# Altium PCB SRLatch.PcbDoc
Units mm, origin at the board's own origin, x right, y up, seen from the top; angles counter-clockwise.
Board outline 50 x 50 mm, 2 copper layers (Top Layer, Bottom Layer); 7 components, 6 nets, 28 pads, 2 vias.
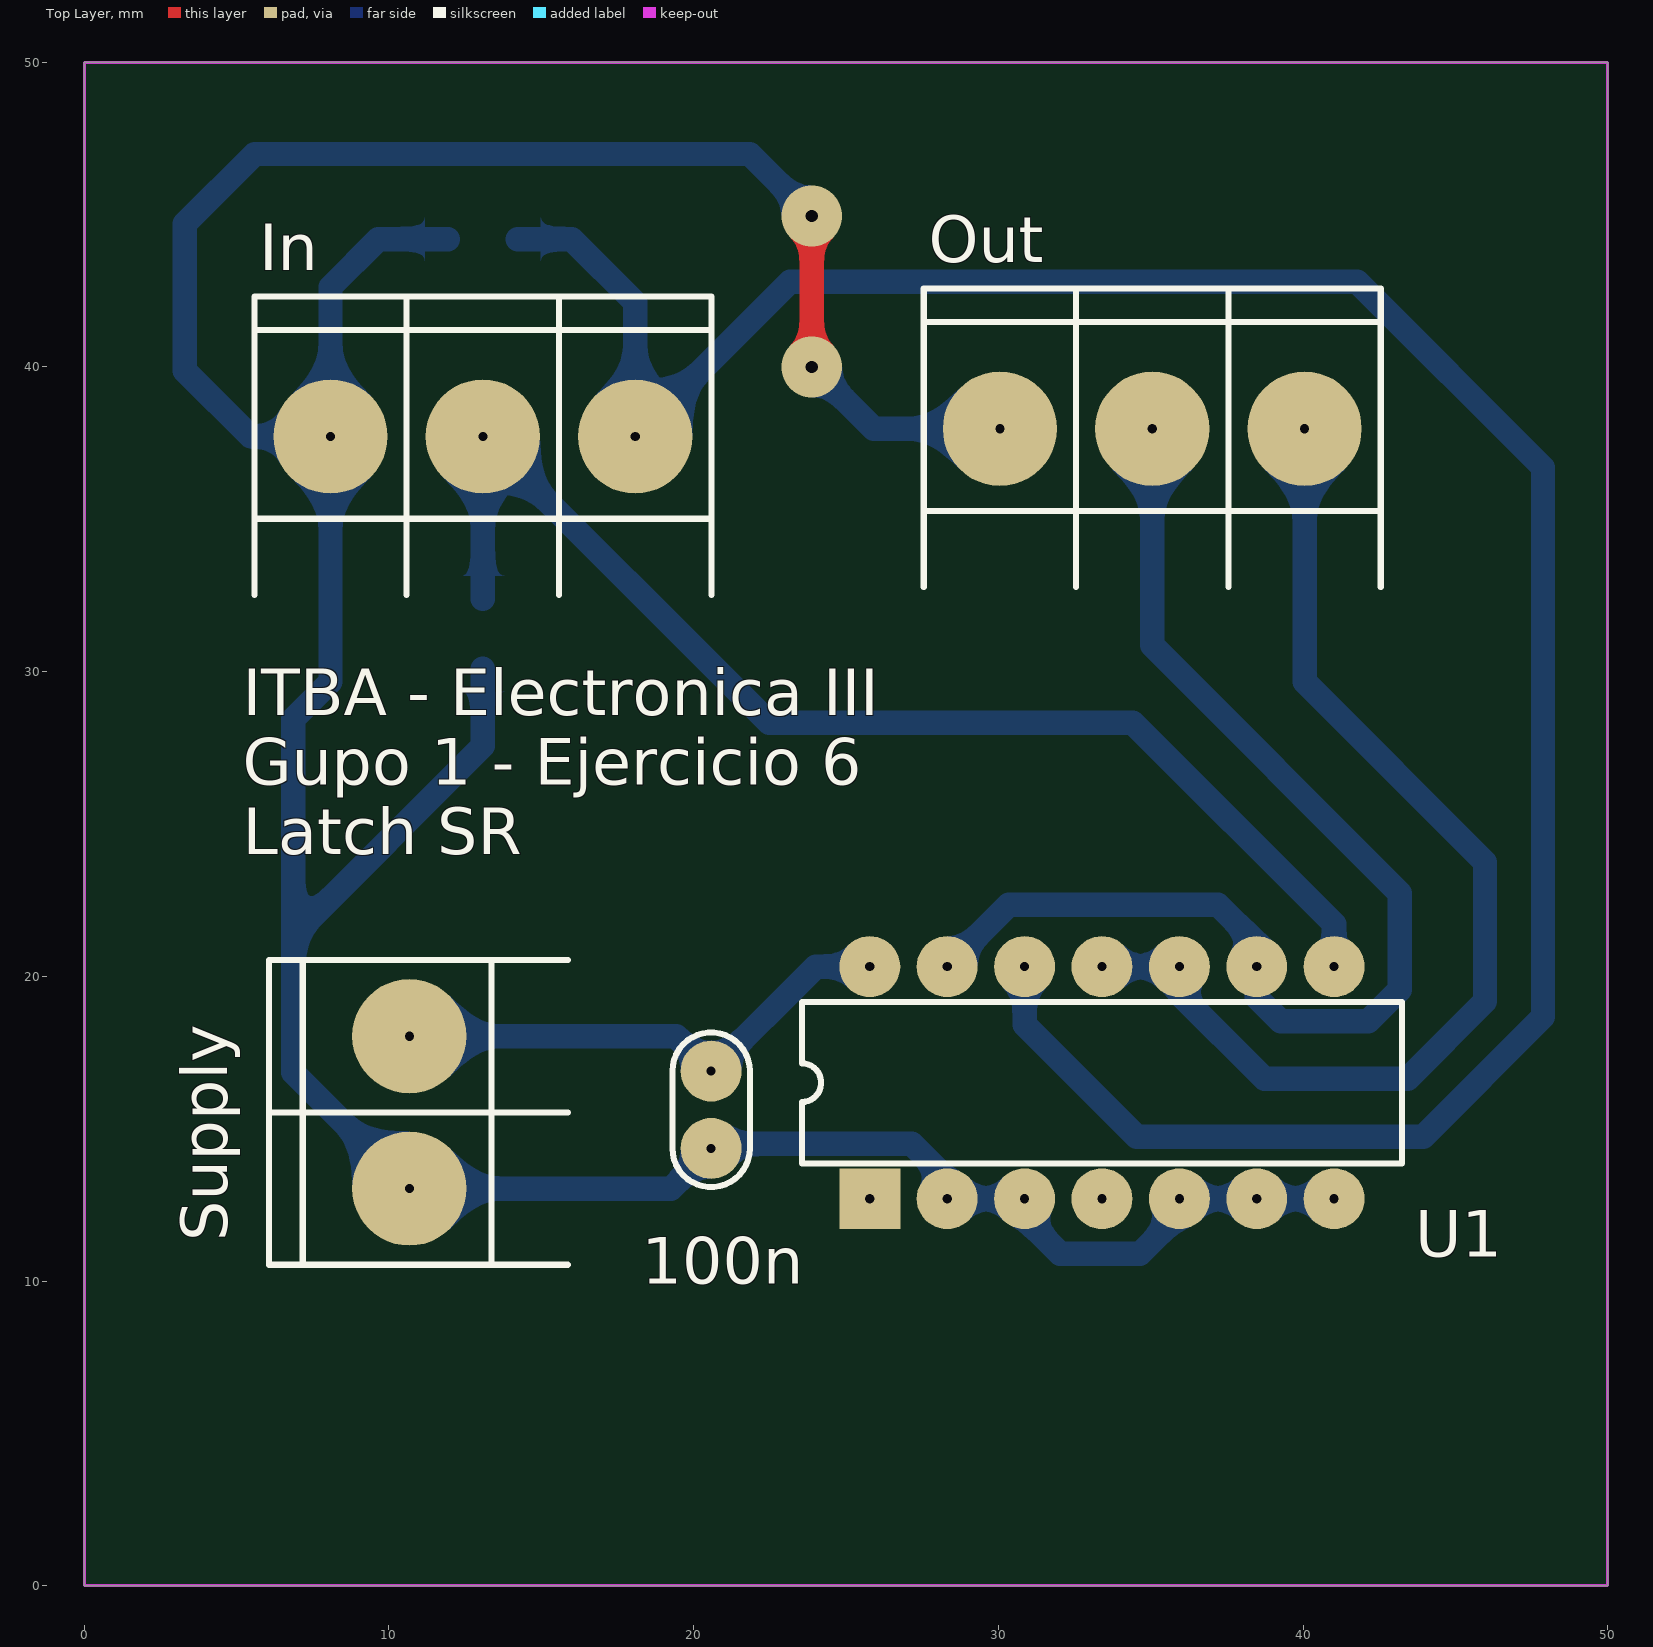
[diagram p0: Top Layer view]
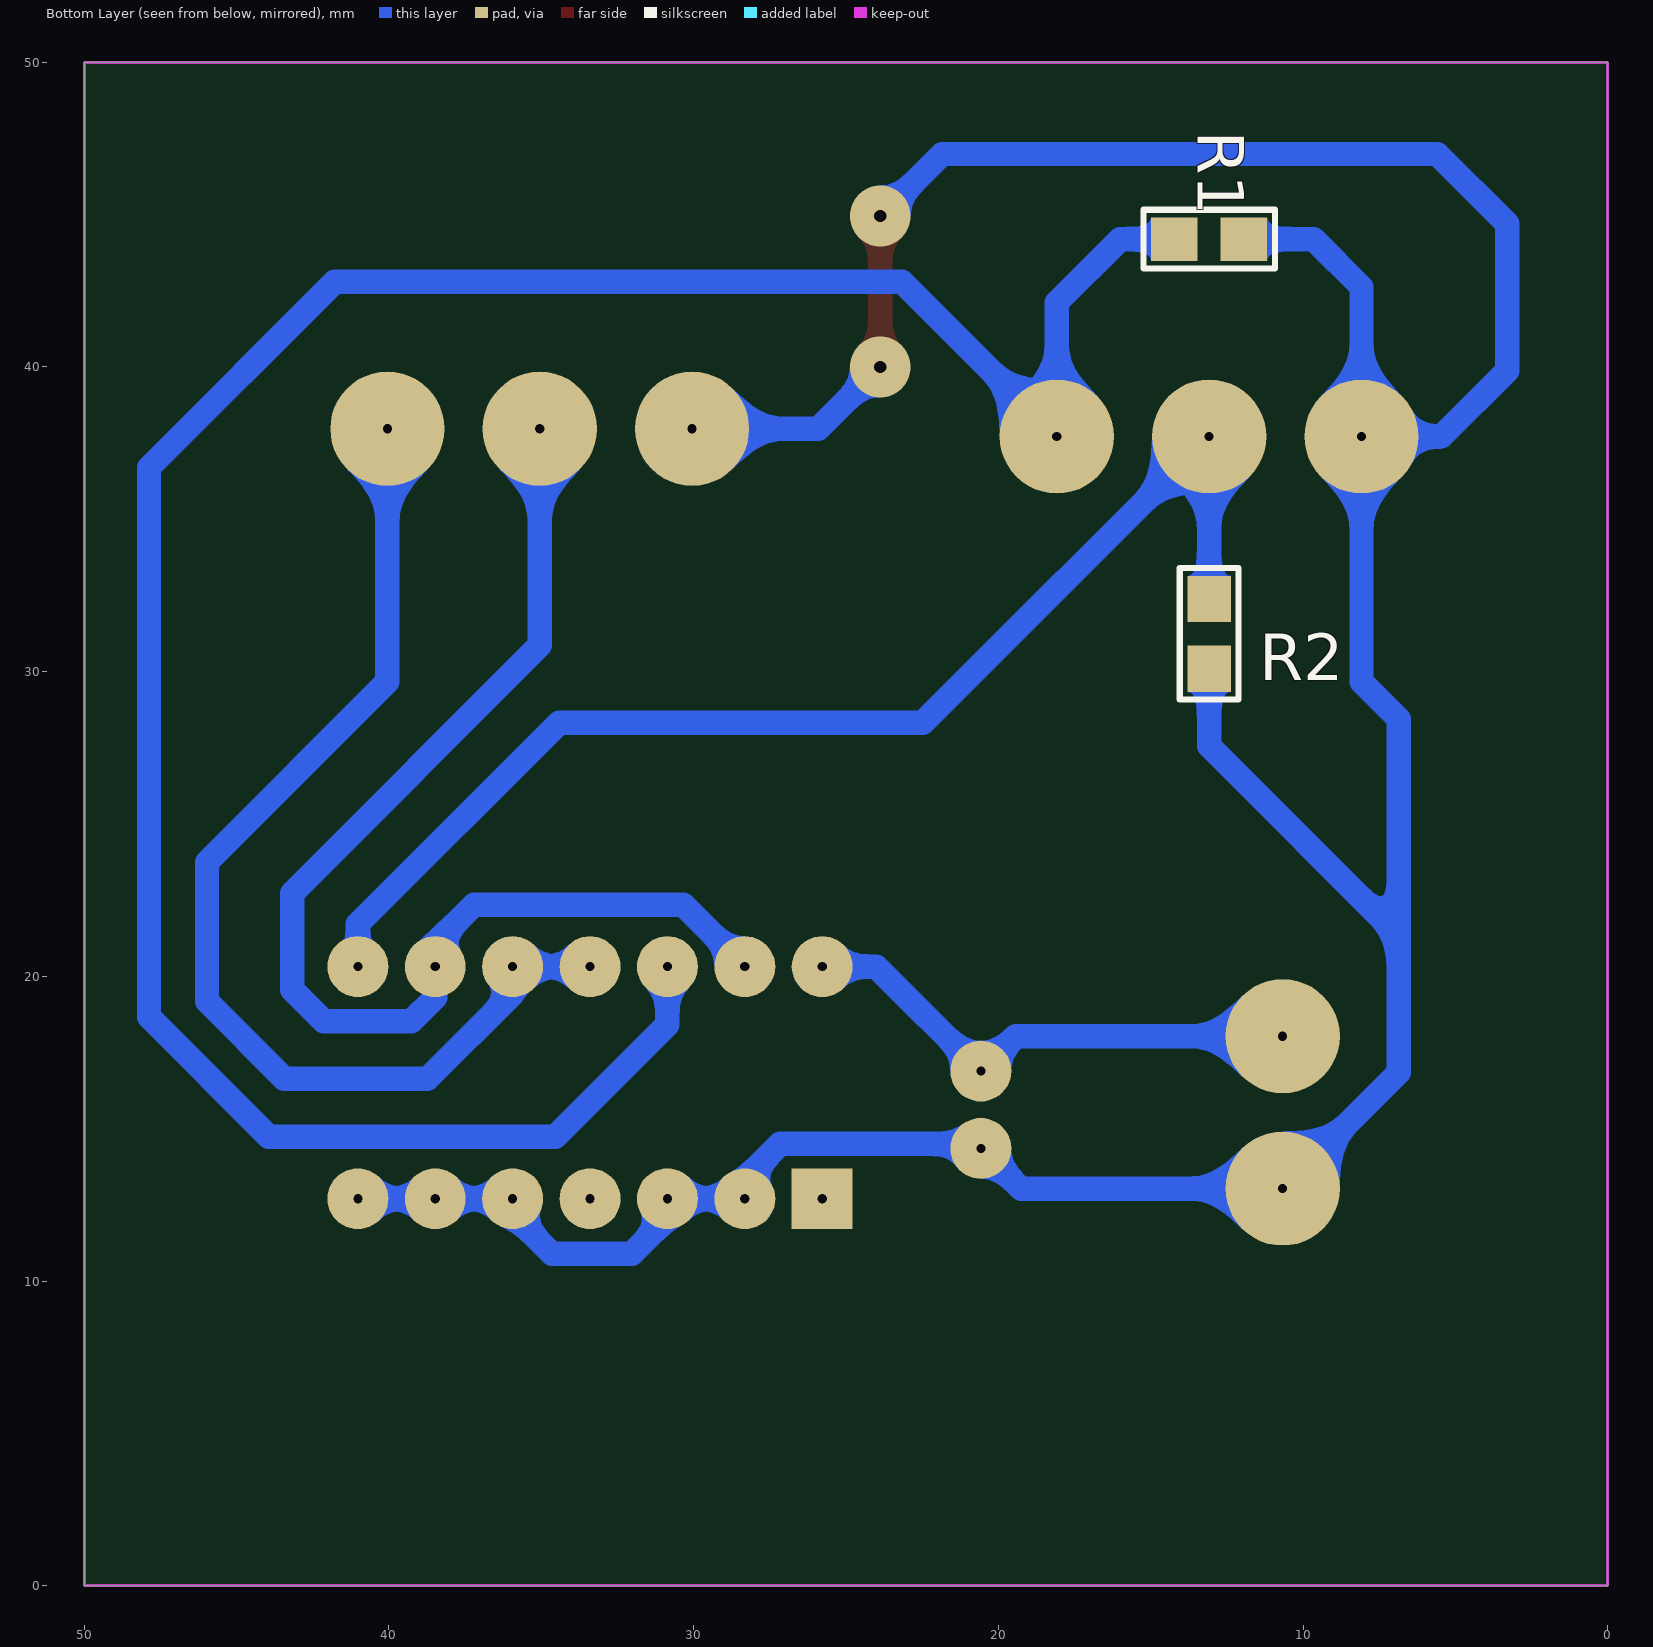
[diagram p1: Bottom Layer view, seen from below]
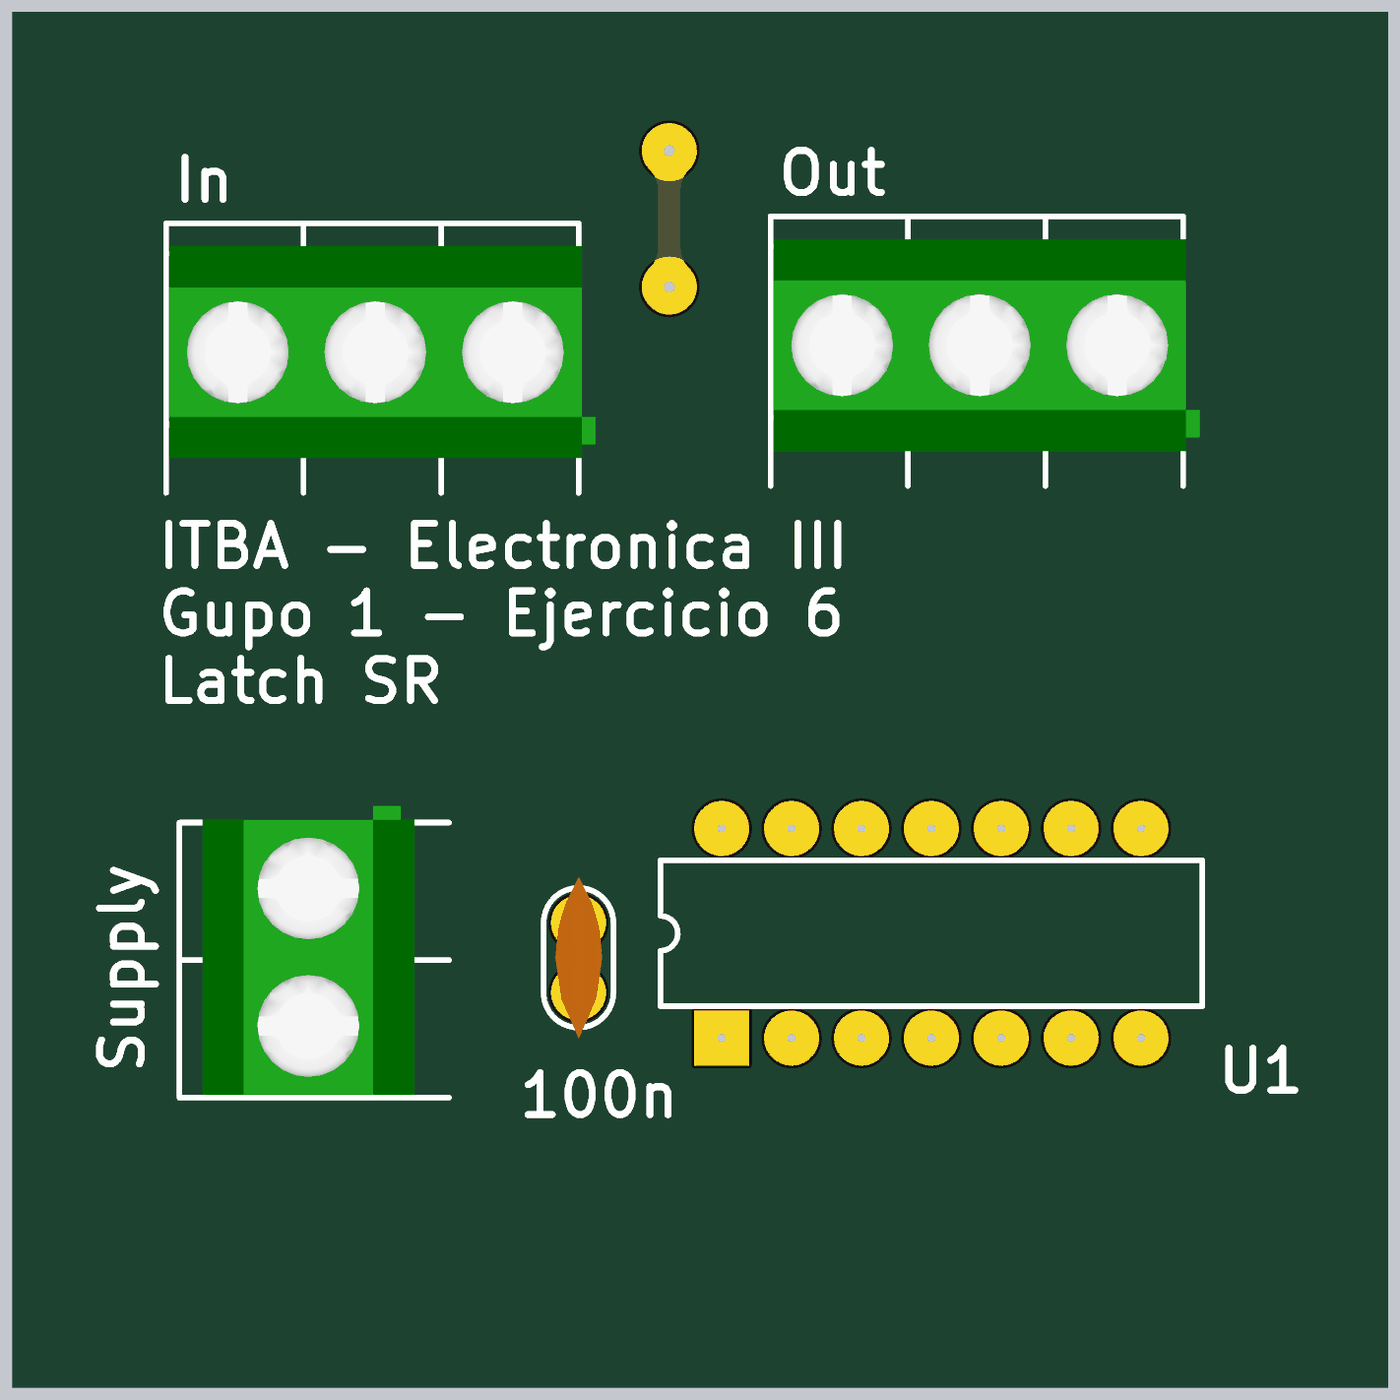
[diagram p2: 3D render of the assembled board from above, using the file's embedded part models]

## Layer stack, top to bottom
Top Solder: solder mask 0.0102, Solder Resist, Dk 3.5
Top Layer: signal copper 0.0356
Dielectric 1: dielectric 0.32, FR-4, Dk 4.8
Bottom Layer: signal copper 0.0356
Bottom Solder: solder mask 0.0102, Solder Resist, Dk 3.5

## Board outline
0,50 0,0 50,0 50,50

## Design rules (kind name [scope] priority, off if disabled: settings)
Clearance [All] p1: gap=0.4 ignorepadtopadclearanceinfootprint=FALSE
PolygonConnect [All] p1: connectstyle=Relief reliefconductorwidth=0.254 reliefentries=4 polygonreliefangle="90 Angle" airgapwidth=0.254
RoutingVias [All] p1: holewidth=0.4 width=2 viastyle="Through Hole" minholewidth=0.4 minwidth=2 maxholewidth=0.4 maxwidth=2
SolderMaskExpansion [All] p1: expansion=0.102
Width [All] p1: maxlimit=0.9 minlimit=0.7 preferedwidth=0.8
30 further rules are at their usual default settings.

## Classes and differential pairs
component class SRLatch: 100n out R1 R2 supply

## Components (designator, comment, footprint, x,y, rotation, side; value= is the part's Value field where it differs from the comment)
100n "CAP" CAP100 20.574,15.621 r270 top (schematic designator C1)
In "BORNERA 3" BORNERA3 13.081,37.719 r270 top (schematic designator in)
Out "BORNERA 3" BORNERA3 35.052,37.973 r270 top (schematic designator out)
R1 "RES" 0805 13.081,44.196 r0 bottom
R2 "RES" 0805 13.081,31.242 r90 bottom
Supply "BORNERA 2" BORNERA2 10.668,15.534 r0 top (schematic designator supply)
U1 "SN74HC02N" N014 33.401,16.51 r0 top

## Footprints (in the part's own frame and the unit in brackets; to place one, negate y for a bottom-side part, rotate by r counter-clockwise, add the part's x,y. Pads: shape width x height; smd on the part's side, far side on the other; paste and mask are expansions set on the pad)
0805 [mil] "Pasivo 0805"
  rect 60x56 smd: 1(-45,0) 2(45,0)
  silkscreen extent -85,-38 85,38, body extent -39,-24 39,25, height 15
BORNERA2 [mm] "Bornera con Tornillos 5mm separación"
  round 3.75 hole 0.3: 1(0,2.5) 2(0,-2.5)
  silkscreen extent -4.6,-5 5.2,5, body extent -3.76,-4.89 3.94,5.61, height 10
BORNERA3 [mm] "Bornera con Tornillos 5mm separación"
  round 3.75 hole 0.3: 1(0,5) 2(0,0) 3(0,-5)
  silkscreen extent -4.6,-7.5 5.2,7.5, body extent -3.76,-7.39 3.94,8.11, height 10.05
CAP100 [mm]
  round 2 hole 0.3: 1(-1.27,0) 2(1.27,0)
  silkscreen extent -2.54,-1.27 2.54,1.27, body extent -2.92,-0.84 2.92,0.86, height 6.12
N014 [mm] "DIP; 14 Leads; Row Spacing 7.62 mm; Pitch 2.54 mm"
  rect 2x2 hole 0.3: 1(-7.62,-3.81)
  round 2 hole 0.3: 2(-5.08,-3.81) 3(-2.54,-3.81) 4(0,-3.81) 5(2.54,-3.81) 6(5.08,-3.81) 7(7.62,-3.81) 8(7.62,3.81) 9(5.08,3.81) 10(2.54,3.81) 11(0,3.81) 12(-2.54,3.81) 13(-5.08,3.81) 14(-7.62,3.81)
  silkscreen extent -9.85,-2.65 9.85,2.65

## Part data
U1: "Quadruple 2-Input Positive-NOR Gate", ComponentLink1Description="Manufacturer Link", ComponentLink1URL=http://www.ti.com/, ComponentLink2Description=Datasheet, ComponentLink2URL=http://www-s.ti.com/sc/ds/sn74hc02.pdf, DatasheetVersion=May-1997, LatestRevisionDate=04-Mar-2005, LatestRevisionNote="Stylized 3D Model Added.", PackageDescription="DIP; 14 Leads; Row Spacing 7.62 mm; Pitch 2.54 mm", PackageReference=N014, PackageVersion=Oct-1995, Published=8-Jun-2000, Publisher="Altium Limited"

## Via types
v1: diameter 2, hole 0.4, Top Layer to Bottom Layer, 2 vias

## Nets (pads, with @x,y where several pads share a name; then routed paths per layer and width w, separated by ;. In a path a pad name is that pad's centre, name@x,y a point inside that pad or via, vN(x,y) a via of type N, cw(c..) or ccw(c..) an arc to the next point about the centre after c; other vN are vias at no path point)
GND: 100n.2 In.3 Out.3 R1.1 R2.1 Supply.2 U1.2 U1.3 U1.5 U1.6 U1.7 | length 126.7
  Top Layer w0.8: v1(23.876,40.005) v1(23.876,44.958)
  Bottom Layer w0.8: R1.1 9.652,44.196 8.081,42.625 In.3 ; R2.1 13.081,27.559 6.858,21.336 ; v1(23.876,40.005) 25.908,37.973 Out.3 ; v1(23.876,44.958) 21.844,46.99 5.588,46.99 3.302,44.704 3.302,39.878 5.461,37.719 In.3 ; U1.7 U1.6 U1.5 35.941,12.192 34.649,10.9 32.026,10.9 30.861,12.065 U1.3 U1.2 28.321,13.335 27.156,14.5 20.574,14.5 100n.2 19.257,13.034 Supply.2 6.858,16.844 6.858,21.336 ; 6.858,21.336 6.858,28.448 8.081,29.671 In.3
Q: Out.1 U1.10 U1.11 | length 36.9
  Bottom Layer w0.8: U1.11 U1.10 35.941,19.431 38.735,16.637 43.434,16.637 45.974,19.177 45.974,23.749 40.052,29.671 Out.1
Qneg: Out.2 U1.9 U1.13 | length 40.5
  Bottom Layer w0.8: U1.13 28.321,20.326 30.347,22.352 37.211,22.352 38.481,21.082 U1.9 38.481,19.304 39.265,18.52 42.142,18.52 43.18,19.558 43.18,22.733 35.052,30.861 Out.2
reset: In.2 R2.2 U1.8 | length 41.3
  Bottom Layer w0.8: R2.2 In.2 22.479,28.321 34.417,28.321 41.021,21.717 U1.8
set: In.1 R1.2 U1.12 | length 83.7
  Bottom Layer w0.8: R1.2 16.002,44.196 18.081,42.117 In.1 23.161,42.799 41.783,42.799 47.879,36.703 47.879,18.669 43.942,14.732 34.544,14.732 30.861,18.415 U1.12
VCC: 100n.1 Supply.1 U1.14 | length 17
  Bottom Layer w0.8: Supply.1 19.431,18.034 100n.1 24.003,20.32 U1.14
pads on no net: U1.1 U1.4

## Keep-outs
Keep-Out Layer:
  the board outline again, w0.1

## Silkscreen, mask and mechanical layers (free items; w line width, h text height)
Top Overlay:
  text "ITBA - Electronica III / Gupo 1 - Ejercicio 6 / Latch SR" at 5.207,24.003 h1.52